# Altium PCB PCB.PcbDoc
Units mil, origin at the board's own origin, x right, y up, seen from the top; angles counter-clockwise.
Board outline 2045 x 1355 mil, 4 copper layers (Top Layer, Layer 1, Layer 2, Bottom Layer), stack 60.91 mil thick; 42 components, 30 nets, 133 pads, 54 vias.
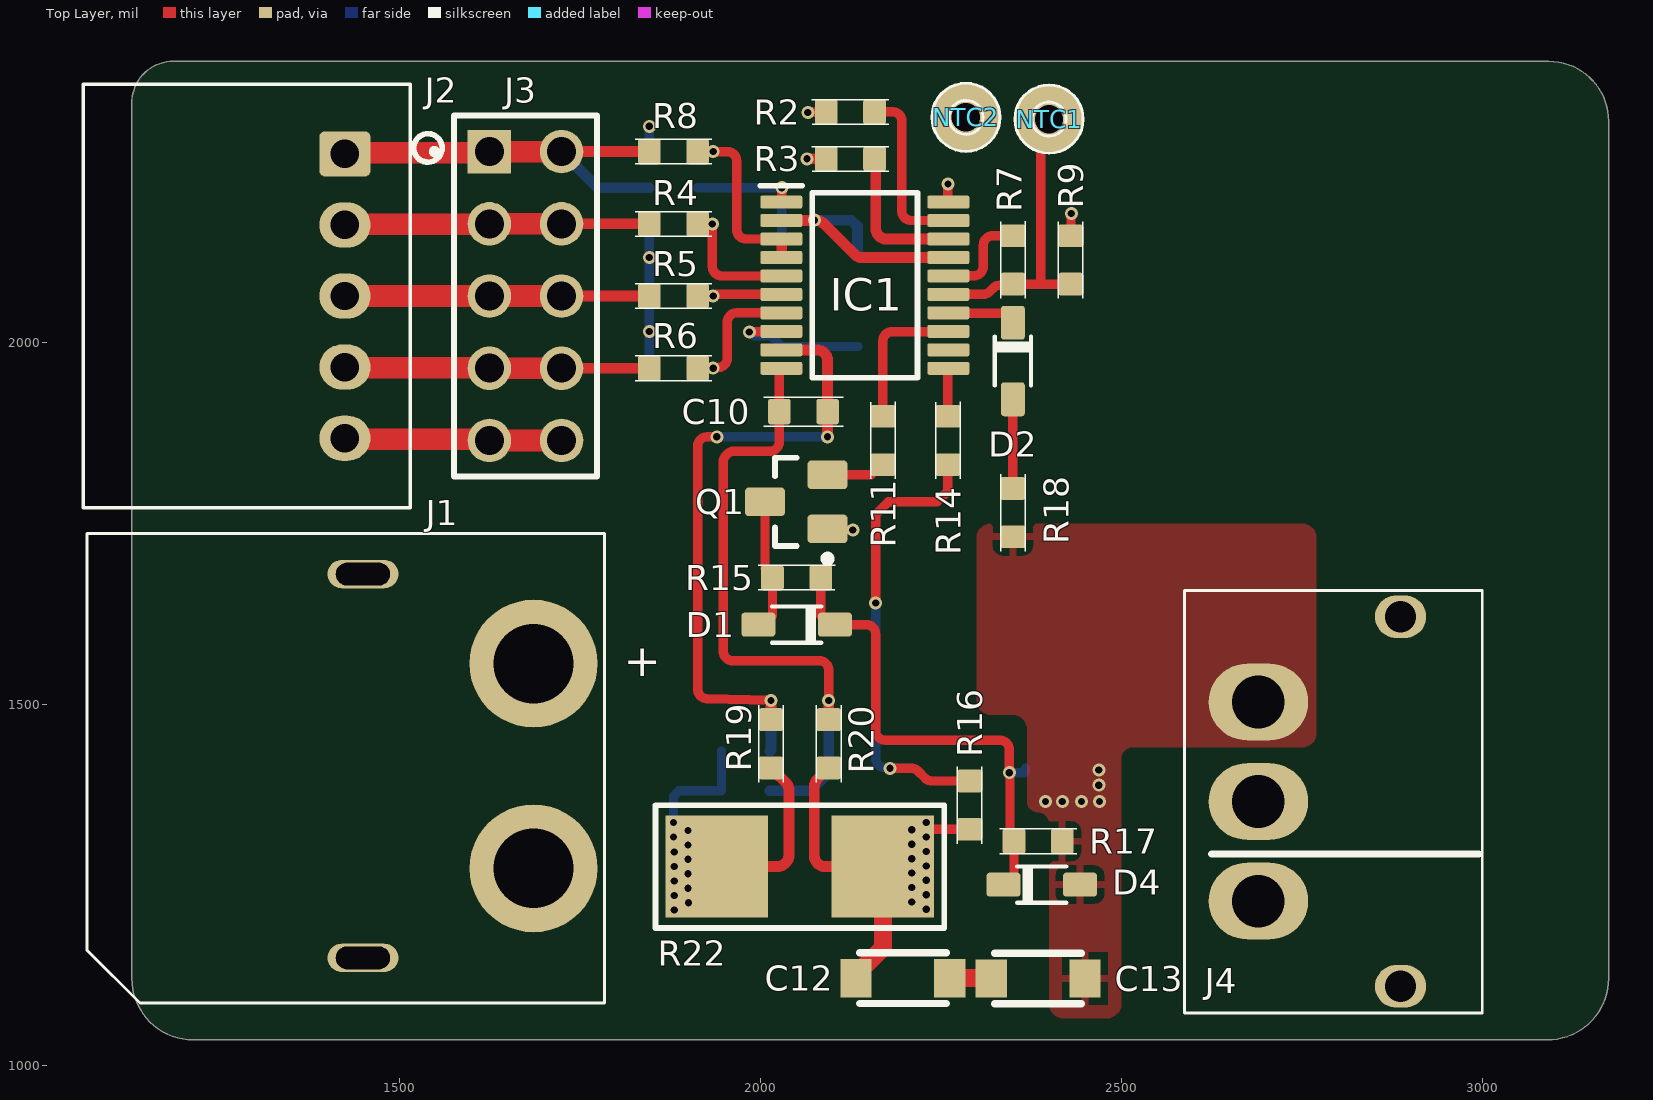
[diagram p0: Top Layer view]
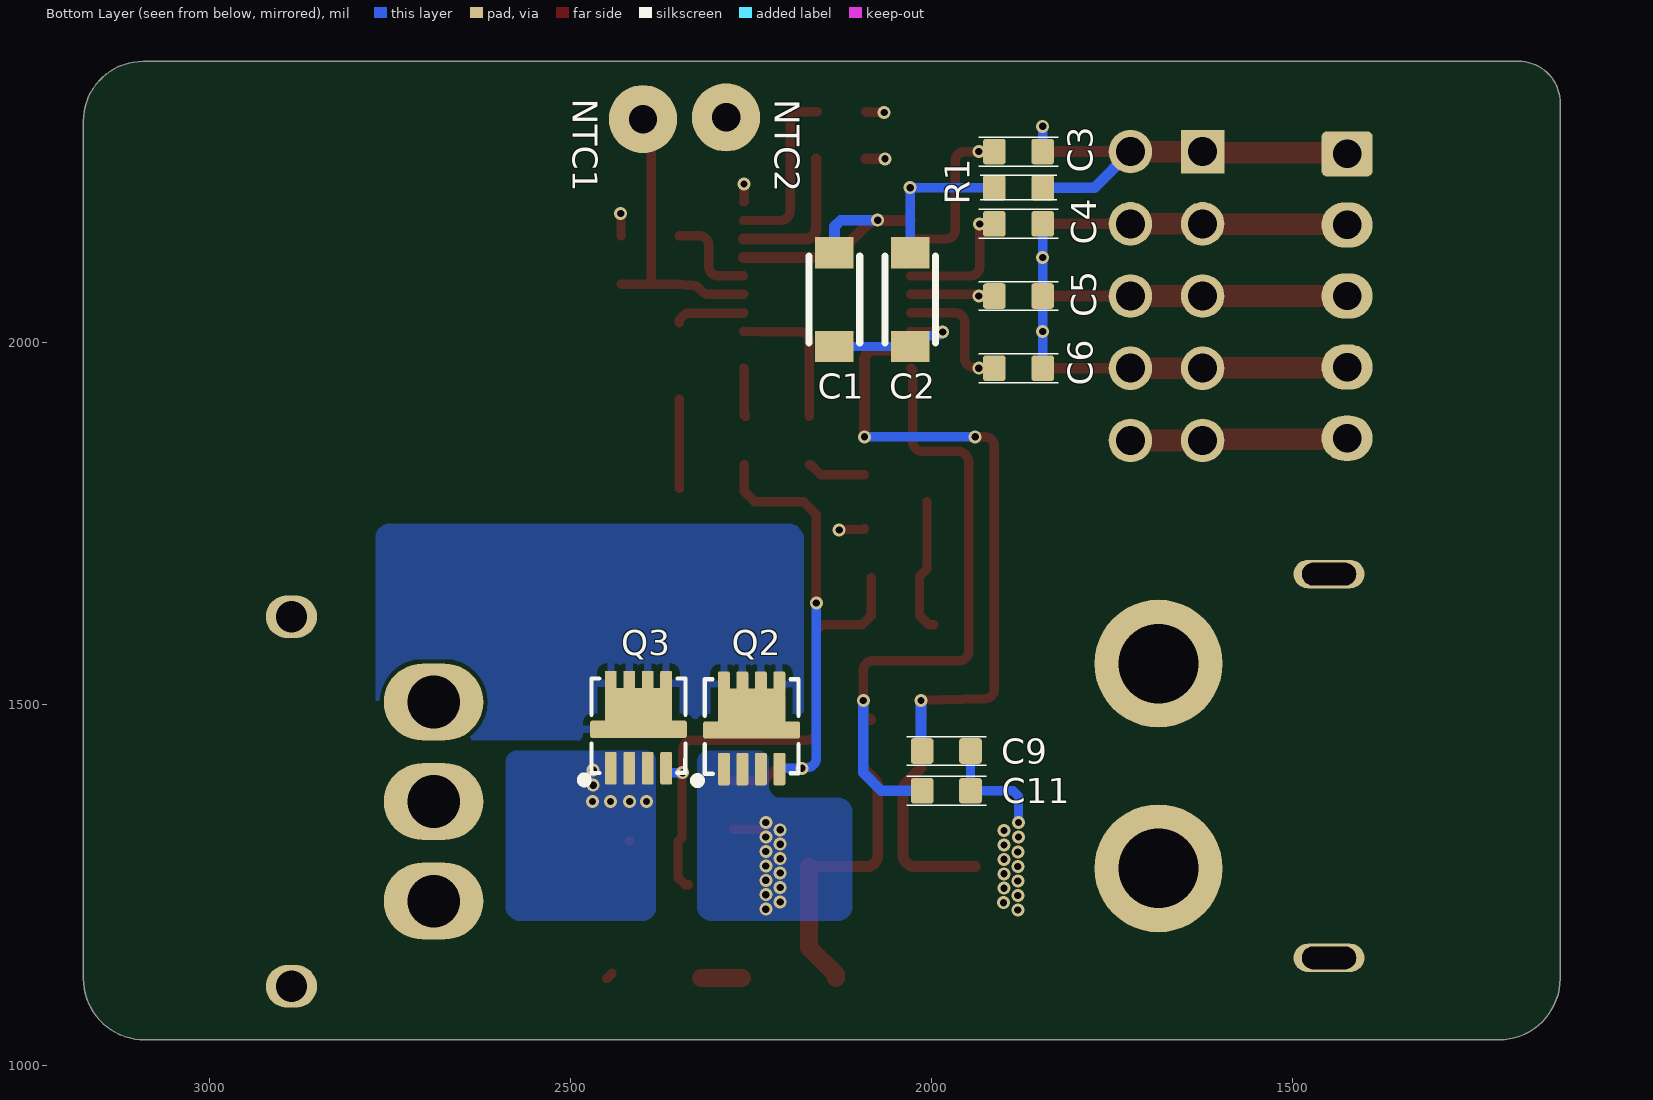
[diagram p1: Bottom Layer view, seen from below]
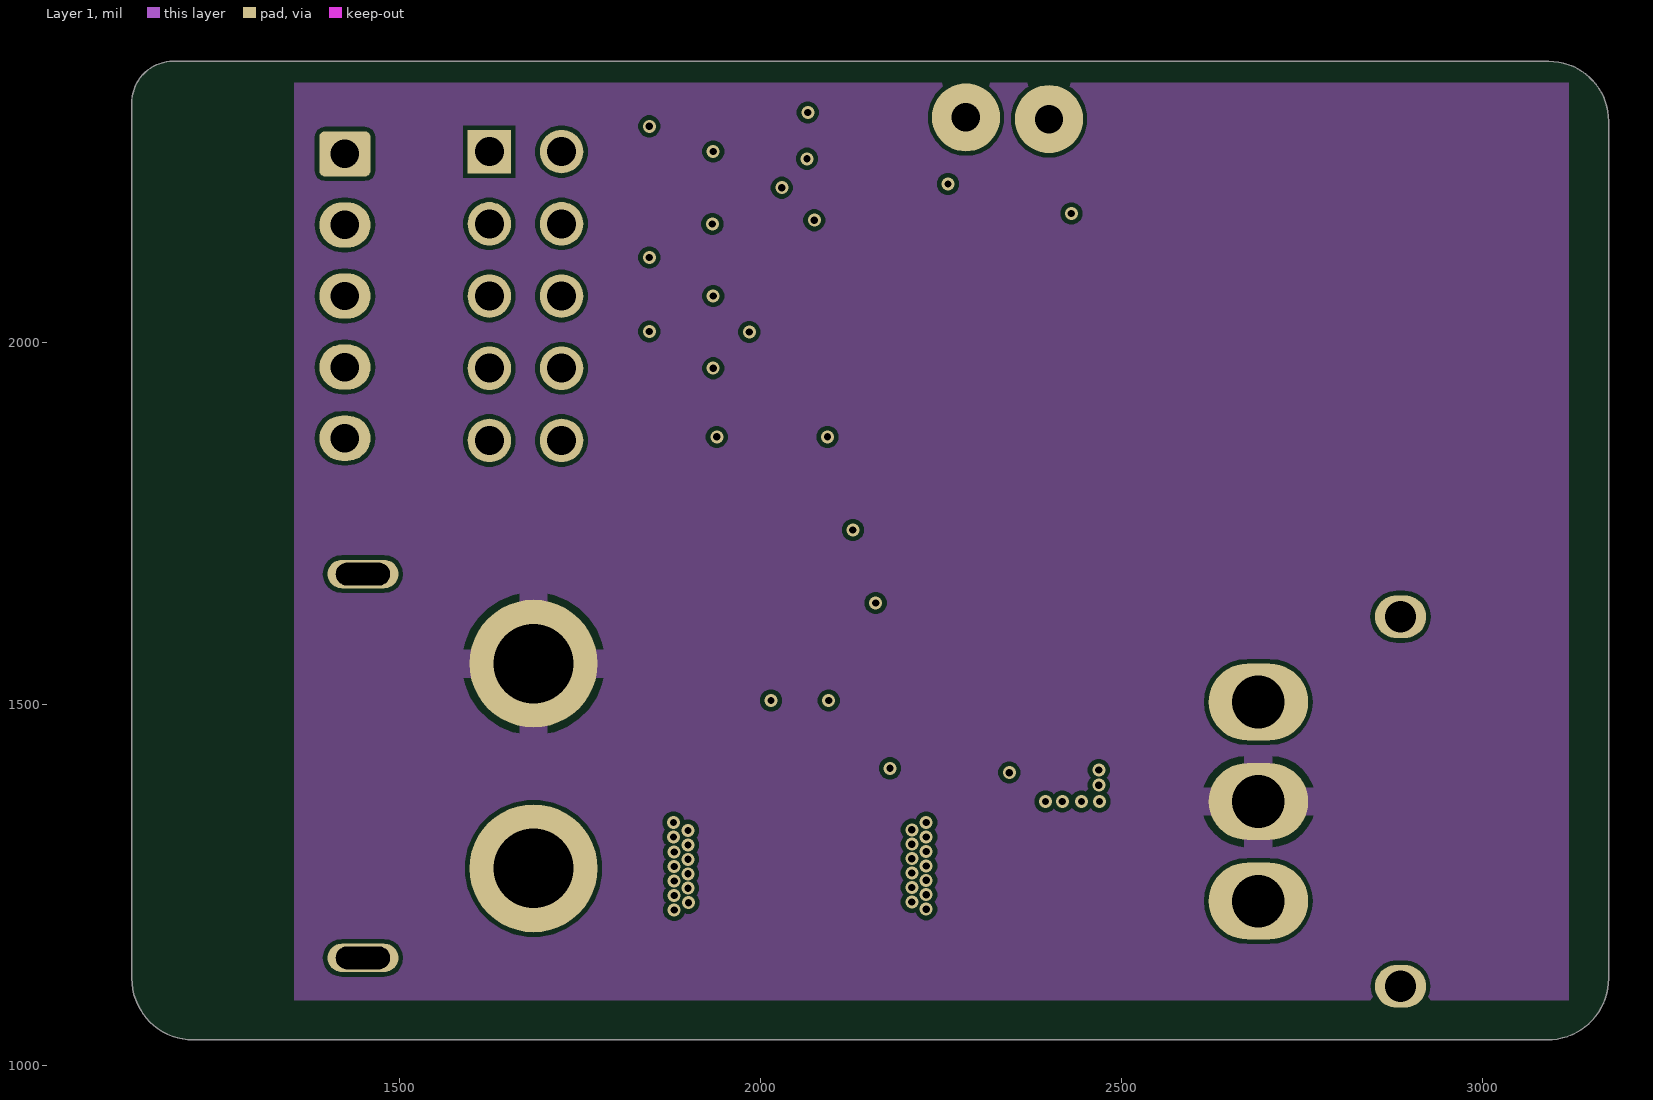
[diagram p2: Layer 1]
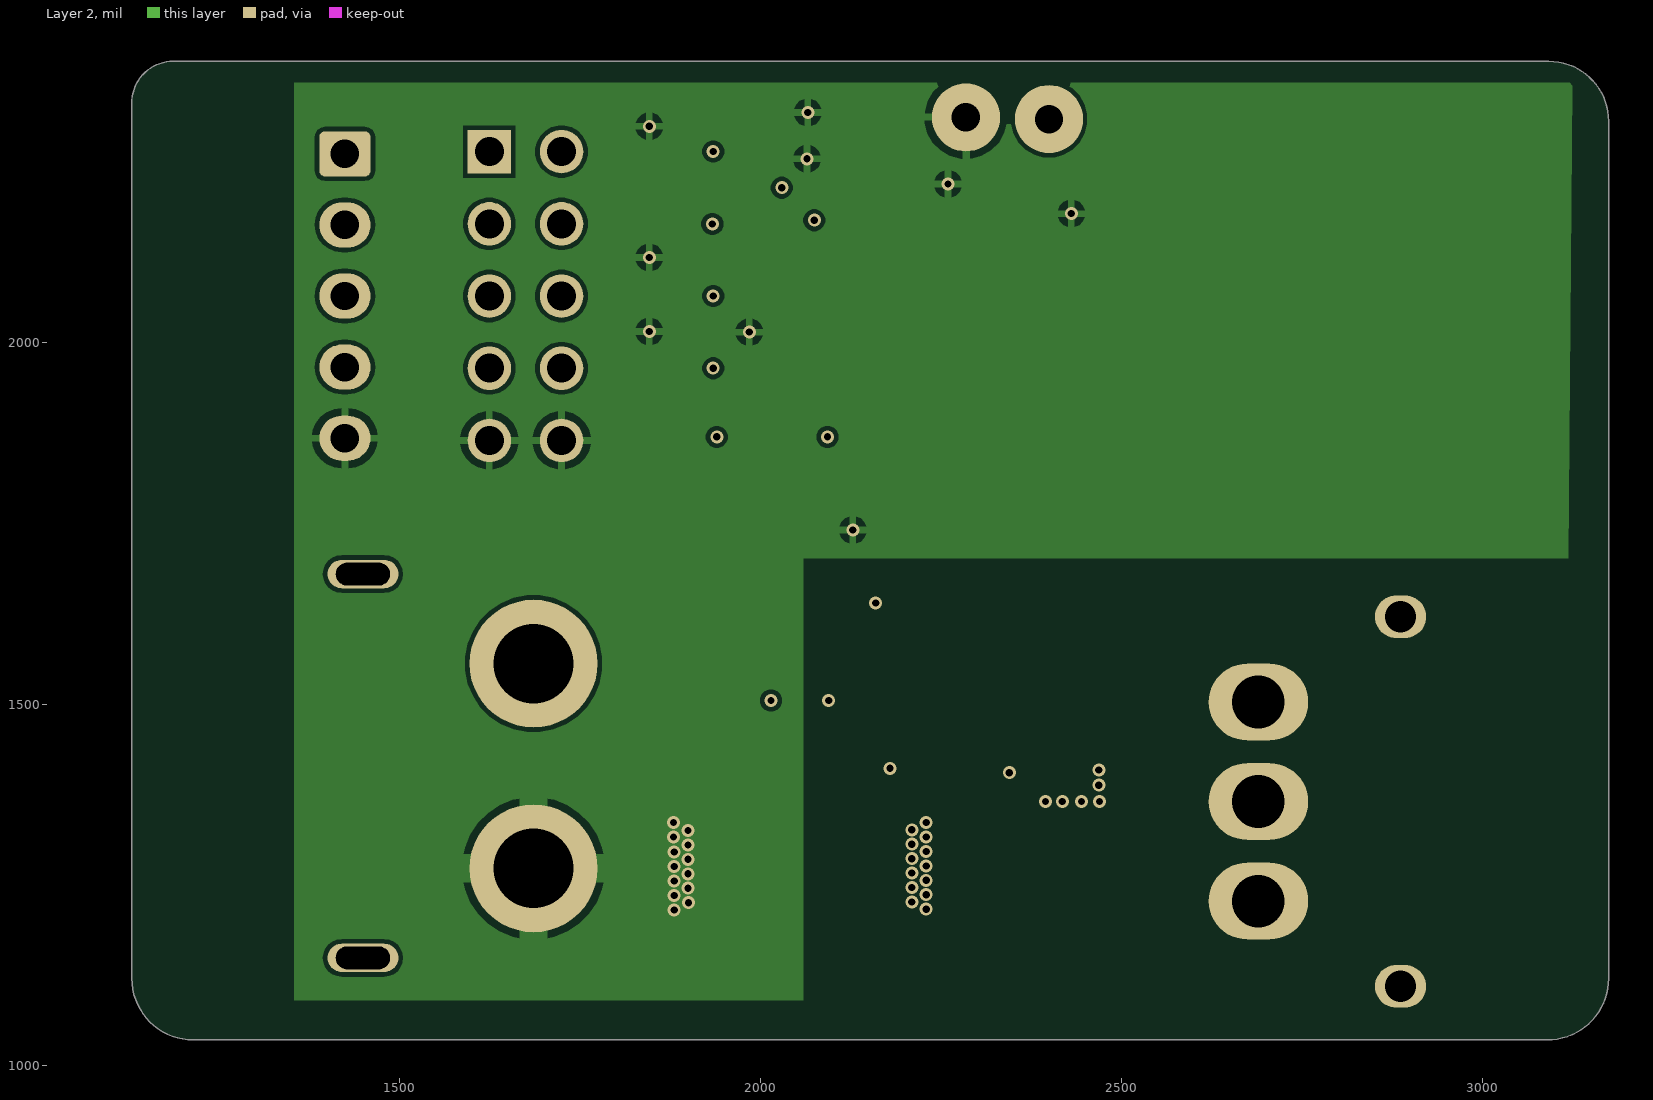
[diagram p3: Layer 2]
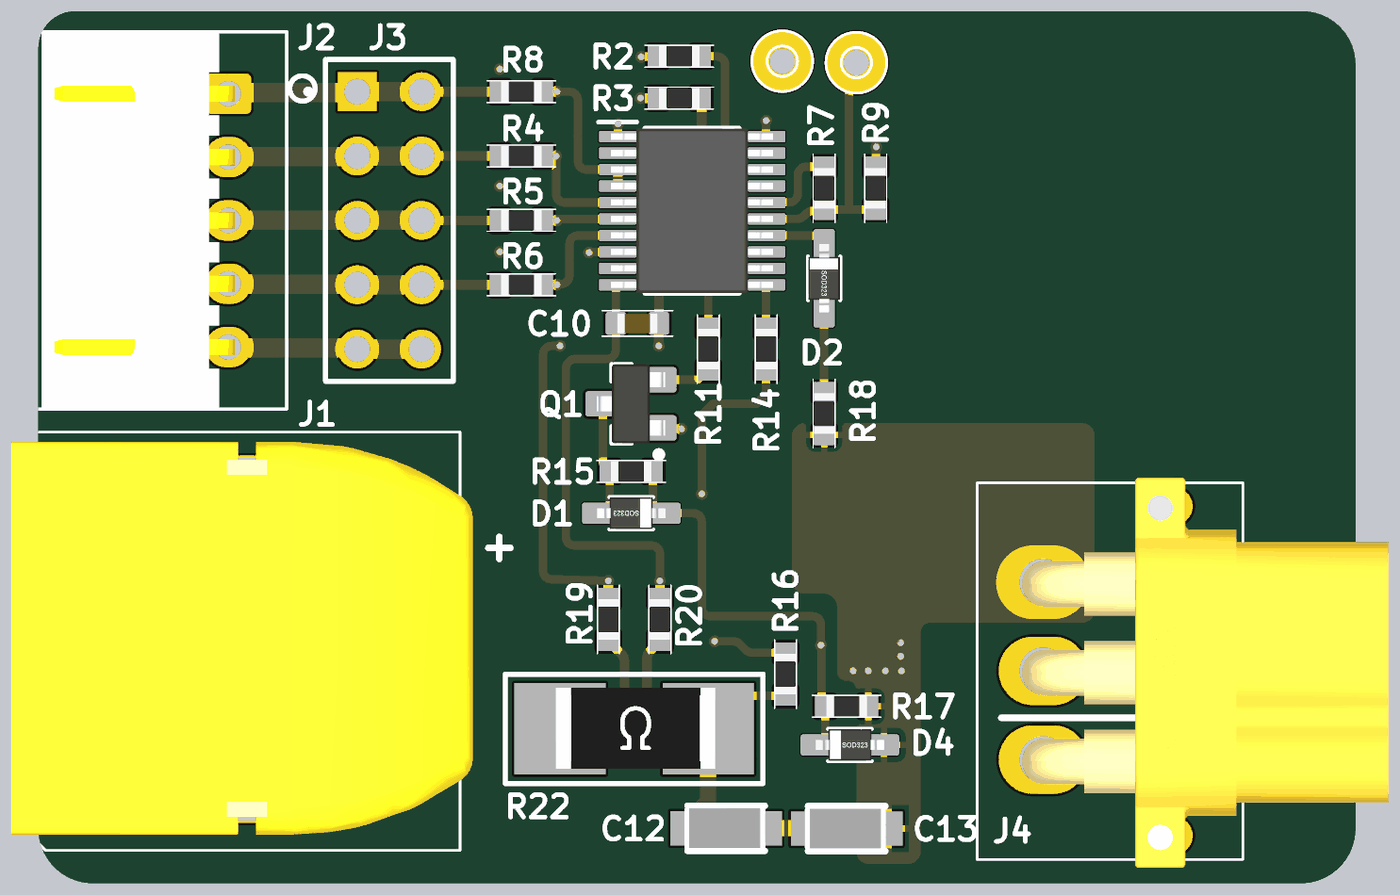
[diagram p4: 3D render of the assembled board from above, using the file's embedded part models]
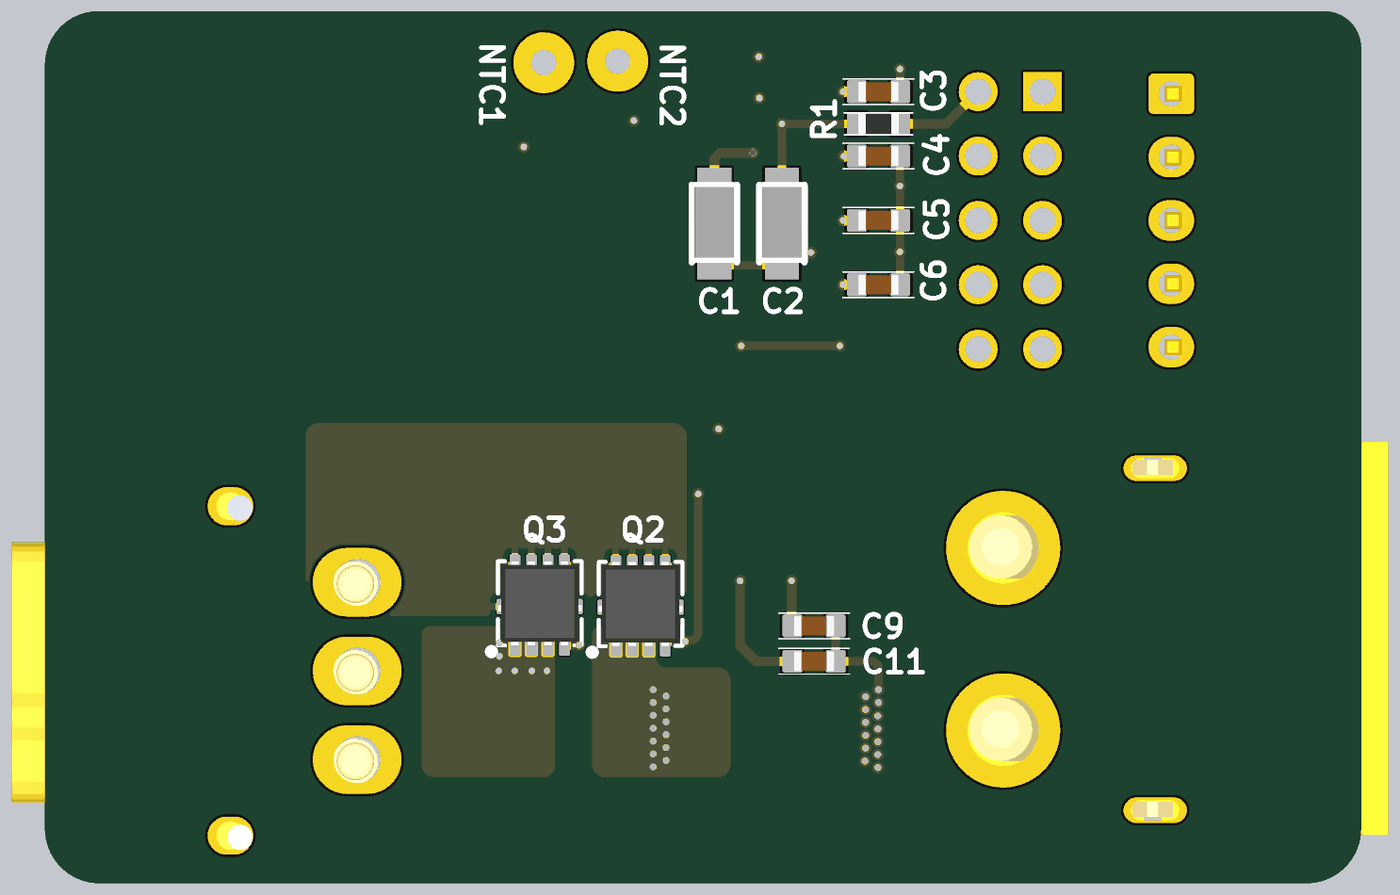
[diagram p5: 3D render of the assembled board from below, using the file's embedded part models]

## Layer stack, top to bottom
Top Solder: solder mask 0.4, Solder Resist, Dk 3.7
Top Layer: signal copper 1.4
Dielectric 2: prepreg 2.7165, PP-006, Dk 4.3
Dielectric 4: prepreg 2.7165, PP-006, Dk 4.3
Layer 1: signal copper 1.378
Dielectric 1: dielectric 44.4882, FR-4, Dk 4.6
Layer 2: signal copper 1.378
Dielectric 5: prepreg 2.7165, PP-006, Dk 4.3
Dielectric 3: prepreg 2.7165, PP-006, Dk 4.3
Bottom Layer: signal copper 1.4
Bottom Solder: solder mask 0.4, Solder Resist, Dk 3.7

## Board outline
1215,1035 3090,1035 ccw(c3090,1120) 3175,1120 3175,2307.07 ccw(c3092.07,2307.07) 3092.07,2390 1187.27,2390 ccw(c1187.27,2332.73) 1130,2332.73 1130,1120 ccw(c1215,1120)

## Design rules (kind name [scope] priority, off if disabled: settings)
Clearance [All] p1: gap=6 ignorepadtopadclearanceinfootprint=FALSE
HoleSize [All] p1: absolutevalues=TRUE maxlimit=100 minlimit=10 maxpercent=80.000 minpercent=20.000
MinimumSolderMaskSliver [All] p1: minsoldermaskwidth=3
PolygonConnect [All] p1: connectstyle=Relief reliefconductorwidth=10 reliefentries=4 polygonreliefangle="90 Angle" airgapwidth=10
RoutingVias [All] p1: holewidth=28 width=50 viastyle="Through Hole" minholewidth=28 minwidth=50 maxholewidth=28 maxwidth=50
SilkToSilkClearance [All] p1: silktosilkclearance=5
SilkToSolderMaskClearance [IsPad] p1: minsilkscreentomaskgap=3 clearancetoexposedcopper=TRUE
SolderMaskExpansion [All] p1: expansion=4 istentingtop=FALSE
Width [All] p1: maxlimit=75 minlimit=5 preferedwidth=12
26 further rules are at their usual default settings.

## Components (designator, comment, footprint, x,y, rotation, side; value= is the part's Value field where it differs from the comment)
C1 "GRM31CC72A475ME11L" C3216_Commercial 2135,2060 r270 bottom value=4.7uF
C2 "GRM31CC72A475ME11L" C3216_Commercial 2030,2060 r270 bottom value=4.7uF
C3 "06035C104K4Z2A" C0603 1880,2265 r0 bottom value=100n
C4 "06035C104K4Z2A" C0603 1880,2165 r0 bottom value=100n
C5 "06035C104K4Z2A" C0603 1880,2065 r0 bottom value=100n
C6 "06035C104K4Z2A" C0603 1880,1965 r0 bottom value=100n
C9 "06035C104K4Z2A" C0603 1980,1435 r0 bottom value=100n
C10 "06035C104K4Z2A" C0603 2060,1905 r180 top value=100n
C11 "06035C104K4Z2A" C0603 1980,1380 r180 bottom value=100n
C12 "GRT31C5C2A104JA12L" C3216_Commercial 2197.78,1120.49 r0 top value=100nF
C13 "GRT31C5C2A104JA12L" C3216_Commercial 2385,1120 r0 top value=100nF
D1 "NRVB0540T1G" SOD323 2050.51,1610 r0 top
D2 "NRVB0540T1G" SOD323 2350,1975 r90 top
D4 "PDZ15B,115" SOD323 2390,1250 r180 top value=15V
IC1 "BQ7790521PW" SOP65P640X120-20N 2145,2080 r0 top
J1 "XT60-PCB-M" XT60-PCB-M 1686.22,1555.98 r0 top
J2 "S5B-XH-A(LF)(SN)" JST_S5B-XH-A(LF)(SN) 1425,2065 r270 top
J3 "HTSW-105-08-TM-D" SAMTEC_HTSW-105-08-TM-D 1675,2065 r270 top
J4 "MR30PW-FB" MR30PW-FB 2690,1227.2 r180 top
NTC1 "TP" "Pad0.8mm MPoint big" 2400,2310 r90 top
NTC2 "TP" "Pad0.8mm MPoint big" 2285,2312.38 r90 top
Q1 "FDV304P" FAIR-SOT23-3_V 2050,1780 r180 top
Q2 "FDMC86102L" PowerPak1212_LFPAK33 2249.66,1469 r180 bottom
Q3 "FDMC86102L" PowerPak1212_LFPAK33 2406.26,1470 r180 bottom
R1 "ERJ-3EKF1002V" R0603 1880,2215 r180 bottom value=1K
R2 "CR0603-FX-10R0ELF" R0603 2125,2320 r0 top value=10R
R3 "CR0603-FX-10R0ELF" R0603 2125,2255 r0 top value=10R
R4 "ERJ-3EKF1002V" R0603 1880,2165 r180 top value=1K
R5 "ERJ-3EKF1002V" R0603 1880,2065 r180 top value=1K
R6 "ERJ-3EKF1002V" R0603 1880,1965 r180 top value=1K
R7 "CRGP0603F10K" R0603 2350,2115 r270 top value=10K
R8 "ERJ-3EKF1002V" R0603 1880,2265 r180 top value=1K
R9 "CRGP0603F10K" R0603 2430,2115 r90 top value=10K
R11 "RC0603FR-074K7L" R0603 2170,1865 r270 top value=4K7
R14 "RC0603FR-074K7L" R0603 2260,1865 r270 top value=4K7
R15 "RC0603JR-071ML" R0603 2050.51,1675 r0 top value=1M
R16 "RC0603JR-071ML" R0603 2290,1360 r270 top value=1M
R17 "RC0603JR-071ML" R0603 2385,1310 r0 top value=1M
R18 "CRGCQ0603F470K" R0603 2350,1765 r270 top value=470K
R19 "RC0603FR-07100RL" R0603 2015,1445 r270 top value=100R
R20 "RC0603FR-07100RL" R0603 2095,1445 r270 top value=100R
R22 "GMR100HTBFMR033" Shunt_2512 2055,1275 r0 top value=0R033

## Footprints (in the part's own frame and the unit in brackets; to place one, negate y for a bottom-side part, rotate by r counter-clockwise, add the part's x,y. Pads: shape width x height; smd on the part's side, far side on the other; paste and mask are expansions set on the pad)
C0603 [mm]
  rrect25% 0.8x0.9 smd: 1(-0.85,0) 2(0.85,0)
  silkscreen extent -1.4,-0.51 1.4,0.51, body extent -0.8,-0.4 0.8,0.4, height 0.6
C3216_Commercial [mm]
  rect 1.1x1.35 smd: 1(-1.65,0) 2(1.65,0)
  silkscreen extent -1.52,-0.89 1.52,0.89, body extent -1.65,-0.8 1.55,0.8, height 1.6
FAIR-SOT23-3_V [mm]
  rrect25% 1.4x1 smd: 1(-1.1,0.95) 2(-1.1,-0.95) 3(1.1,0)
  silkscreen extent -1.23,-1.55 0.75,2.12, body extent -1.35,-1.56 1.35,1.56, height 1.2
JST_S5B-XH-A(LF)(SN) [mm]
  rrect25% 1.59x1.8 hole 1: 1(-5,0)
  oval 1.59x1.8 hole 1: 2(-2.5,0) 3(0,0) 4(2.5,0) 5(5,0)
  silkscreen extent -7.45,-9.2 7.45,3.42, body extent -7.45,-7.37 7.45,0.25, height 5.75
MR30PW-FB [mm]
  oval 3.5x2.7 hole 1.85: 1(0,0) 2(0,-3.5) 3(0,-7)
  oval 1.8x1.5 hole 1.1: 5(-5,3) 5(-5,-10)
  silkscreen extent -7.87,-10.92 2.6,3.94, body extent -13.62,-11.13 0.83,4.27, height 5.3
"Pad0.8mm MPoint big" [mm]
  round 2.4 hole 1: 1(0,0)
  silkscreen extent -1.2,-1.2 1.2,1.2
PowerPak1212_LFPAK33 [mil]
  rrect25% 16.5x45 smd mask+2: 1(-38.4,-59) 2(-12.8,-59) 3(12.8,-59) 4(38.4,-59)
  rrect25% 16.5x34 smd mask+2: 5(-38.4,59) 5(-12.8,59) 5(12.8,59) 5(38.4,59)
  rrect25% 134x24 smd mask+2: 5(0,-5)
  rrect25% 93.31x69.29 smd mask+2: 5(0.01,17.78)
  silkscreen extent -77,-77 65,65, body extent -65,-65 65,65, height 44
R0603 [mm]
  rrect25% 0.8x0.9 smd: 1(-0.85,0) 2(0.85,0)
  silkscreen extent -1.35,-0.43 1.35,0.43, body extent -0.8,-0.4 0.8,0.4, height 0.4
SAMTEC_HTSW-105-08-TM-D [mm]
  rect 1.53x1.53 hole 1.02: 01(-5.08,-1.27)
  round 1.53 hole 1.02: 02(-5.08,1.27) 03(-2.54,-1.27) 04(-2.54,1.27) 05(0,-1.27) 06(0,1.27) 07(2.54,-1.27) 08(2.54,1.27) 09(5.08,-1.27) 10(5.08,1.27)
  silkscreen extent -6.35,-3.3 6.35,2.51
Shunt_2512 [mm]
  rect 3.6x3.6 smd: 1(-2.921,0) 2(2.921,0)
  silkscreen extent -5.08,-2.16 5.08,2.16, body extent -3.09,-1.57 3.21,1.63, height 0.66
SOD323 [mil]
  rrect25% 47x33 smd paste+0 mask+2: 1(-53,0) 2(53,0)
  silkscreen extent -34,-25 34,25, body extent -53,-25 53,25, height 43
SOP65P640X120-20N [mm]
  rrect25% 1.475x0.45 smd mask+0.051: 1(-2.938,2.925) 2(-2.938,2.275) 3(-2.938,1.625) 4(-2.938,0.975) 5(-2.938,0.325) 6(-2.938,-0.325) 7(-2.938,-0.975) 8(-2.938,-1.625) 9(-2.938,-2.275) 10(-2.938,-2.925) 11(2.938,-2.925) 12(2.938,-2.275) 13(2.938,-1.625) 14(2.938,-0.975) 15(2.938,-0.325) 16(2.938,0.325) 17(2.938,0.975) 18(2.938,1.625) 19(2.938,2.275) 20(2.938,2.925)
  silkscreen extent -3.67,-3.25 1.85,3.5, body extent -3.2,-3.25 3.2,3.25, height 1.13
XT60-PCB-M [mm]
  round 4.5 hole 2.8: 1(0,0) 2(0,-7.2)
  oval 2.5x1 hole 0.8 slot 1.9 at 0 deg: 3(-6,-10.35) 4(-6,3.15)
  silkscreen extent -15.7,-11.94 2.5,4.57, body extent -15.2,-11.31 3,4.19, height 8.41

## Part data
C1 C2: library part CC_1206_X7S_475, "Capacitor X7S", Supplier Part Number 1=81-GRM31CC72A475ME11, Supplier 1=Mouser, Supplier 2=Digi-Key, Supplier Part Number 2=490-18621-6-ND
C3 C4 C5 C6 C9 C10 C11: library part CC_0603_X7R_104, "Ceramic Capacitor X7R 50V", Manufacturer Part Number="100n/50V X7R C0603", Supplier Part Number 1=581-06035C104K4Z2A, Category="Capacitors CERA SMD", Component Type=Capacitors, Main=Capacitors, Part Number="100n/50V X7R C0603", SMD/THD=SMD, Status=A, Supplier 1=Mouser, Supplier 2=Farnell, Supplier Part Number 2=1833843
C12 C13: library part CC_1206_NP0_104, "Capacitor NP0", Supplier Part Number 1=81-GRT31C5C2A104JA2L, Supplier 1=Mouser, Supplier 2=Digi-Key, Supplier Part Number 2=490-GRT31C5C2A104JA12LDKR-ND
D1 D2: "Schottky Diode 40V, 500mA", Supplier Part Number 1=863-NRVB0540T1G, Category=Schottky, Main=Diodes, SMD/THD=SMD, Status=A, Supplier 1=Mouser, Supplier 2=Farnell, Supplier Part Number 2=2723913
D4: "Zener Diode 15V, 400mW", Supplier Part Number 1=771-PDZ15B-T/R, Category=Zener, Main=Diodes, SMD/THD=SMD, Status=A, Supplier 1=Mouser, Supplier 2=Farnell, Supplier 3=TME, Supplier Part Number 2=1757852, Supplier Part Number 3=PDZ15B.115
IC1: "3- to 5-series Li-Ion stackable battery protector", Manufacturer_Name="Texas Instruments", Mouser Part Number=595-BQ7790521PW, Supplier Part Number 1=595-BQ7790521PWR, Datasheet Link=https://www.ti.com/lit/ds/symlink/bq77905.pdf?ts=1621687207060&ref_url=https%253A%252F%252Fwww.ti.com%252Fstore%252Fti%252Fen%252Fp%252Fproduct%252F%253Fp%253DBQ7790521PW, Height=1.2mm, Manufacturer_Part_Number=BQ7790521PW, Mouser Price/Stock=https://www.mouser.co.uk/ProductDetail/Texas-Instruments/BQ7790521PW?qs=bAKSY%2FctAC4iC2ww%2F8Jy9A%3D%3D, Supplier 1=Mouser, Supplier 2=Digi-Key, Supplier 3="Texas Instruments", Supplier Part Number 2=296-BQ7790521PWRCT-ND, Supplier Part Number 3=BQ7790521PWR
J1: "XT60 Connector", Manufacturer_Name=Amass, Manufacturer_Part_Number=XT30PB, Datasheet Link=https://www.tme.eu/Document/4acc913878197f8c2e30d4b8cdc47230/XT30UPB%20SPEC.pdf, Height=10.7mm
J2: "Connector Header Through Hole, Right Angle 5 position 0.098 _2.50mm_", Package=None, Availability=Unavailable, MF="JST Sales", MP=S5B-XH-A_LF__SN_, Price=None, SnapEDA_Link=https://www.snapeda.com/parts/S5B-XH-A%28LF%29%28SN%29/JST%20Sales%20America%20Inc./view-part/494428/?ref=snap
J3: "HEADER, 10 CONTACTS, 2 ROWS, THROUGH HOLE, 2.54 MM; Connector Systems:Board-to-Board; Pitch Spacing:2.54mm; No. of Rows:2Rows; No. of Contacts:10Contacts; Contact Termination Type:Through Hole; Product Range:HTSW Series RoHS Compliant: Yes", Package=None, Availability="In Stock", Check_prices=https://www.snapeda.com/parts/HTSW10508TMD/Samtec/view-part/?ref=eda, MF=Samtec, MP=HTSW10508TMD, Price=None, SnapEDA_Link=https://www.snapeda.com/parts/HTSW10508TMD/Samtec/view-part/?ref=snap
J4: "Connector", Supplier 1=TME, Supplier Part Number 1=MR30PW-FB
NTC1 NTC2: library part TP_PCB, "Test Point", Category=Pads_Pins_Measure_Points, Component Type=Mechanical, Main=Mechanical, Stock number=--------
Q1: "P-Channel Digital FET, -25 V, -0.46 A, 0.35 W, -55 to 150 degC, 3-Pin SOT-23, -55 to 150 degC, RoHS, Tape and Reel", Manufacturer="ON Semiconductor / Fairchild", Maximum Continuous Drain Current=0.46A, Maximum Drain Source Voltage=25V, Maximum Gate Source Voltage=8V, Operating Temperature=-55to150°C, Package=3SOT-23, Package Description="3-Pin Small Outline Transistor, Body 2.92 x 1.325 mm, Pitch 0.95 mm", Package Reference=SOT23-3, Package Version="Rev. 12, 03/2016", Supplier Part Number 1=FDV304PCT-ND, Category=MOSFET, Channel Mode=Enhancement, Channel Type=P, Datasheet URL=https://www.fairchildsemi.com/datasheets/FD/FDV304P.pdf, Datasheet Version="Rev. E1, 08/1997", Manufacturer Part Number=FDV304P, Manufacturer URL=https://www.fairchildsemi.com/, Mounting=SurfaceMount, Mounting Technology=SurfaceMount, Package URL=http://www.fairchildsemi.com/dwg/MA/MA03D.pdf, Packaging=Tape&Reel, Rad Hard=No, RDS-on=1100@4.5VmOhm, Supplier 1=Digi-Key, Supplier 2=Digi-Key, Supplier Part Number 2=FDV304PDKR-ND, Typical Fall Time=35ns, Typical Rise Time=8ns, Typical Turn-Off Delay Time=55ns, Typical Turn-On Delay Time=6ns
Q2 Q3: "N-MOS 100V, 18A, 23mOhm", Manufacturer="ON Semiconductor / Fairchild", Category=N-MOS, Component Type=Transistors, ComponentLink1Description=Datasheet, ComponentLink1URL=http://www.farnell.com/datasheets/1837750.pdf, Main=Transistors, Manufacturer Part Number=FDMC86102L, Part Number=FDMC86102L, SMD/THD=SMD, Status=A
R1 R4 R5 R6 R8: library part CR_0603_102, "Resistor 1%, 0.1W, 75V", Supplier Part Number 1=667-ERJ-3EKF1002V, Category="Resistors SMD", Component Type=Resistors, Main=Resistors, SMD/THD=SMD, Status=A, Supplier 1=Mouser, Supplier 2=Digi-Key, Supplier 3=Farnell, Supplier Part Number 2=P10.0KHCT-ND, Supplier Part Number 3=2303192
R2 R3: library part CR_0603_100, "Resistor 1%, 0.1W, 75V", Supplier Part Number 1=652-CR0603FX-10R0ELF, Category="Resistors SMD", Component Type=Resistors, Main=Resistors, SMD/THD=SMD, Status=A, Supplier 1=Mouser, Supplier 2=Farnell, Supplier 3=Digi-Key, Supplier Part Number 2=2321756, Supplier Part Number 3=CR0603-FX-10R0ELFDKR-ND
R7 R9: library part CR_0603_103, "Resistor 1%, 0.1W, 75V", Supplier Part Number 1=279-CRGP0603F10K, Category="Resistors SMD", Component Type=Resistors, Main=Resistors, SMD/THD=SMD, Status=A, Supplier 1=Mouser, Supplier 2=Digi-Key, Supplier 3=Farnell, Supplier Part Number 2=A130428CT-ND, Supplier Part Number 3=2861046
R11 R14: library part CR_0603_472, "Resistor 1%, 0.1W, 75V", Supplier Part Number 1=603-RC0603FR-074K7L, Category="Resistors SMD", Component Type=Resistors, Main=Resistors, SMD/THD=SMD, Status=A, Supplier 1=Mouser, Supplier 2=Farnell, Supplier 3=TME, Supplier Part Number 2=9238565, Supplier Part Number 3=RC0603FR-074K7
R15 R16 R17: library part CR_0603_105, "Resistor 1%, 0.1W, 75V", Manufacturer Part Number="1M0 R0603", Supplier Part Number 1=603-RC0603JR-071ML, Category="Resistors SMD", Component Type=Resistors, Main=Resistors, Part Number="1M0 R0603", SMD/THD=SMD, Status=A, Supplier 1=Mouser, Supplier 2=TME, Supplier 3=Digi-Key, Supplier Part Number 2=RC0603JR-071M, Supplier Part Number 3=311-1.0MGRCT-ND
R18: library part CR_0603_474, "Resistor 1%, 0.1W, 75V", Supplier Part Number 1=279-CRGCQ0603F470K, Category="Resistors SMD", Component Type=Resistors, Main=Resistors, SMD/THD=SMD, Status=A, Supplier 1=Mouser, Supplier 2=Digi-Key, Supplier 3=TME, Supplier Part Number 2=A129720CT-ND, Supplier Part Number 3=CRGCQ0603F470K
R19 R20: library part CR_0603_101, "Resistor 1%, 0.1W, 75V", Supplier Part Number 1=603-RC0603FR-07100RL, Category="Resistors SMD", Component Type=Resistors, Main=Resistors, SMD/THD=SMD, Status=A, Supplier 1=Mouser, Supplier 2=Farnell, Supplier 3=TME, Supplier Part Number 2=9238360, Supplier Part Number 3=RC0603FR-07100R
R22: library part SHUNT_2512_0R033, "Current Sense Resistor 1%, 3W, AEC-Q200", Supplier Part Number 1=755-GMR100HTBFMR033, Category="Resistors SMD", Component Type=Resistors, Main=Resistors, SMD/THD=SMD, Status=A, Supplier 1=Mouser, Supplier 2=Digi-Key, Supplier 3=Farnell, Supplier Part Number 2=511-1690-1-ND, Supplier Part Number 3=2808333

## Via types
v1: diameter 18, hole 10, Top Layer to Bottom Layer, tented both sides, 54 vias

## Nets (pads, with @x,y where several pads share a name; then routed paths per layer and width w, separated by ;. In a path a pad name is that pad's centre, name@x,y a point inside that pad or via, vN(x,y) a via of type N, cw(c..) or ccw(c..) an arc to the next point about the centre after c; other vN are vias at no path point)
GND: C1.2 C2.2 C3.1 C4.1 C5.1 C6.1 C9.1 C11.2 IC1.8 IC1.20 J1.2 J2.5 J3.09 J3.10 NTC2.1 Q1.1 R2.1 R3.1 R9.2 R19.2 R22.1 | length 1284
  Top Layer w13: v1(1985,2015) 1985.79,2015.79 2029.1,2015.79 IC1.8 ; v1(2065.96,2319.12) 2066.4,2319.56 2091.1,2319.56 R2.1 ; Q1.1 2094.13,1741.78 2127.58,1741.78 v1(2128.4,1740.96) ; v1(2260,2220) 2260,2195.83 IC1.20 ; R9.2 2430.48,2148.94 2430.48,2178.64 v1(2430.96,2179.12)
  Top Layer w15: R22.1 2023.79,1275 ccw(c2023.79,1290) 2034.39,1279.39 2035.61,1280.61 ccw(c2025,1291.21) 2040,1291.21 2040,1380.32 ccw(c2025,1380.32) 2035.61,1390.93 2020.61,1405.93 R19.2 ; v1(2065,2255) R3.1
  Top Layer w30: J2.5 1426.57,1866.57 1623.43,1866.57 J3.09 J3.10
  Bottom Layer w13: C6.1 v1(1846.54,2016.02) C5.1 v1(1846.54,2118.39) C4.1 ; C3.1 v1(1846.54,2300) ; v1(1880,1335.93) 1880,1372.38 1887.62,1380 C11.2 C9.1 ; v1(1985,2015) 1986.35,2015 1991.16,2010.19 2014.85,2010.19 C2.2 C1.2
  other v1: 1880.94,1214.96 1900.94,1224.96 1880.94,1234.96 1900,1245 1880.94,1254.96 1900,1265 1880.94,1274.96 1900,1285 1880.94,1294.96 1900,1305 1880,1315.93 1900,1325
NetC1_1: C1.1 IC1.2 IC1.17 | length 351.5
  Top Layer w15: IC1.2 2074.57,2169.57 v1(2075,2170) 2077.17,2170 cw(c2077.17,2155) 2087.74,2165.65 2130.61,2122.77 ccw(c2141.21,2133.39) 2141.21,2118.39 IC1.17
  Bottom Layer w15: v1(2075,2170) 2126.21,2170 2135,2161.21 C1.1
NetC2_1: C2.1 IC1.1 R1.1 | length 226.7
  Top Layer w13: IC1.1 2030,2195.83 v1(2030,2215)
  Bottom Layer w13: R1.1 v1(2030,2215) C2.1
NetC3_2: C3.2 IC1.3 IC1.4 R8.1 | length 264.2
  Top Layer w13: v1(1935,2265) 1954.53,2265 cw(c1954.53,2252) 1967.53,2252.05 1967.53,2156.93 ccw(c1980.53,2156.98) 1980.48,2143.98 IC1.3
  Top Layer w15: R8.1 v1(1935,2265) ; IC1.4 2030,2119.06 2030,2135
  Bottom Layer w15: C3.2 v1(1935,2265)
NetC4_2: C4.2 IC1.5 R4.1 | length 202.7
  Top Layer w13: v1(1933.8,2164.82) 1933.8,2105.8 ccw(c1946.8,2105.8) 1946.8,2092.8 IC1.5
  Top Layer w15: R4.1 1931.47,2165 cw(c1931.47,2150) v1(1933.8,2164.82)
  Bottom Layer w15: C4.2 1913.56,2164.91 1933.71,2164.91 v1(1933.8,2164.82)
NetC5_2: C5.2 IC1.6 R5.1 | length 138.3
  Top Layer w13: v1(1935,2065) 1936.35,2065 1938.56,2067.2 IC1.6
  Top Layer w15: R5.1 v1(1935,2065)
  Bottom Layer w15: C5.2 v1(1935,2065)
NetC6_2: C6.2 IC1.7 R6.1 | length 202.3
  Top Layer w13: v1(1935,1965) 1935.96,1965.96 1941.53,1965.96 ccw(c1941.53,1978.96) 1954.53,1978.96 1954.53,2028.61 cw(c1967.53,2028.61) 1967.53,2041.61 IC1.7
  Top Layer w15: R6.1 v1(1935,1965)
  Bottom Layer w13: C6.2 v1(1935,1965)
NetC9_2: C9.2 C10.1 IC1.9 R19.1 | length 908.1
  Top Layer w13: v1(1940,1870) 1926.52,1870 ccw(c1926.52,1857) 1913.52,1857 1913.52,1520.42 ccw(c1926.52,1520.42) 1926.13,1507.43 v1(2015,1505)
  Top Layer w15: R19.1 v1(2015,1505) ; IC1.9 2078.46,1990.43 cw(c2078.46,1975.43) 2093.46,1975.43 C10.1 2093.39,1904.92 2093.39,1870.08 v1(2093.31,1870)
  Bottom Layer w13: v1(1940,1870) v1(2093.31,1870)
  Bottom Layer w15: C9.2 2015,1436.54 v1(2015,1505)
NetC10_2: C10.2 C11.1 IC1.10 R20.1 | length 881
  Top Layer w13: IC1.10 2028.89,1964.84 2026.54,1962.48 2026.54,1863 cw(c2013.54,1863) 2013.54,1850 1963.73,1850 ccw(c1963.73,1837) 1954.53,1846.19 1952.81,1844.47 ccw(c1962,1835.27) 1949,1835.27 1949,1573 ccw(c1962,1573) 1962,1560 2082,1560 cw(c2082,1547) 2095,1547 v1(2095,1505)
  Top Layer w15: R20.1@2085,1478.46 R20.1@2085.77,1479.23 ; R20.1 v1(2095,1505)
  Bottom Layer w15: C11.1 2070,1380 2095,1405 v1(2095,1505)
NetC12_1: C12.1 Q2.1 Q2.2 Q2.3 R16.2 R20.2 R22.2 | length 454.5
  Top Layer w13: v1(2230,1335.93) 2230,1330.9 2234.37,1326.54 R16.2@2275,1326.54
  Top Layer w15: R20.2 2079.39,1395.93 ccw(c2090,1385.32) 2075,1385.32 2075,1289.95 ccw(c2090,1290) 2089.95,1275 R22.2
  Top Layer w25: C12.1 2132.82,1125.41 2170,1162.59 R22.2
  other v1: 2230,1215.93 2210,1225.93 2230,1235.93 2210,1245.93 2230,1255.93 2210,1265.93 2230,1275.93 2210,1285.93 2230,1295.93 2210,1305.93 2230,1315.93 2210,1325.93
NetC12_2: C12.2 C13.1 | length 57.5
  Top Layer w13: C13.1@2319.55,1120.49 C13.1
  Top Layer w25: C12.2 C13.1@2319.55,1120.49
NetC13_2: C13.2 D4.1 J4.3 Q3.1 Q3.2 Q3.3 R17.2 R18.2 | length 10.3
  Top Layer w13: R17.2 R17.2@2418.8,1310.34 ; C13.2@2443,1126.96 C13.2
  other v1: 2395,1365 2418.46,1365 2445,1365 2470,1365 2468.89,1387.71 2468.89,1408.71
NetD1_1: D1.1 Q1.3 R15.1 | length 186.5
  Top Layer w13: D1.1 2004.51,1610 2017.05,1622.54 R15.1 2017.05,1676.97 2006.69,1687.32 Q1.3
NetD1_2: D1.2 D4.2 Q3.4 R15.2 R17.1 | length 701.2
  Top Layer w13: R15.2 2083.98,1622.54 2096.51,1610 2147,1610 cw(c2147,1597) 2160,1597 2160,1463 ccw(c2173,1463) 2173,1450 2332,1450 cw(c2332,1437) 2345,1437 v1(2345,1405) 2345.96,1404.04 2345.96,1315.58 R17.1 2351.54,1260 2341.54,1250 D4.2
  Bottom Layer w13: v1(2345,1405) 2366.11,1405 2367.86,1406.75 Q3.4
NetD2_1: D2.1 R18.1 | length 123.5
  Top Layer w13: R18.1 D2.1
NetD2_2: D2.2 IC1.14 | length 97
  Top Layer w13: IC1.14 2260.9,2041.38 2340,2041.38 2350,2031.38 D2.2
NetIC1_11: IC1.11 R14.1 | length 67.7
  Top Layer w13: R14.1@2258.03,1898.46 2260,1900.43 2260,1964.17 IC1.11 IC1.11@2260.83,1965
NetIC1_13: IC1.13 R11.1 | length 202.4
  Top Layer w13: R11.1 2170,2002.79 cw(c2183,2002.79) 2183,2015.79 2238.13,2015.79 IC1.13
NetIC1_15: IC1.15 NTC1.1 R7.2 R9.1 | length 406.7
  Top Layer w13: IC1.15 2283.2,2067.44 2308.74,2067.44 ccw(c2308.74,2080.44) 2317.91,2071.22 2322.65,2075.96 cw(c2331.82,2066.74) 2331.82,2079.74 2338.78,2079.74 R7.2 2388.46,2081.54 ; NTC1.1 2388.46,2298.46 2388.46,2081.54 ; R9.1 2388.46,2081.54
NetIC1_16: IC1.16 R7.1 | length 133.4
  Top Layer w13: IC1.16@2260.9,2093.03 2296.08,2093.03 ccw(c2296.08,2106.03) 2309.08,2106.03 2309.08,2135.46 cw(c2322.08,2135.46) 2322.08,2148.46 R7.1
NetIC1_18: IC1.18 R3.2 | length 205.3
  Top Layer w15: R3.2@2160,2255.01 2160,2158.98 ccw(c2175,2158.98) 2175,2143.98 IC1.18
NetIC1_19: IC1.19 R2.2 | length 241.5
  Top Layer w13: R2.2 2183.3,2320 cw(c2183.3,2307) 2196.3,2307.05 2196.3,2182.57 ccw(c2209.3,2182.57) 2209.3,2169.57 IC1.19
NetJ1_1: J1.1 J4.2
NetJ2_1: J2.1 J3.01 J3.02 R1.2 R8.2 | length 565.1
  Top Layer w15: J3.02 R8.2
  Top Layer w30: J2.1 1426.57,2263.43 1623.43,2263.43 J3.01 J3.02
  Bottom Layer w15: J3.02 1775,2215 R1.2
NetJ2_2: J2.2 J3.03 J3.04 R4.2 | length 422.2
  Top Layer w15: J3.04 R4.2
  Top Layer w30: J2.2 1425.79,2164.21 1624.21,2164.21 J3.03 J3.04
NetJ2_3: J2.3 J3.05 J3.06 R5.2 | length 421.5
  Top Layer w15: J3.06 R5.2
  Top Layer w30: J2.3 J3.05 J3.06
NetJ2_4: J2.4 J3.07 J3.08 R6.2 | length 422.2
  Top Layer w15: J3.08 R6.2
  Top Layer w30: J2.4 1425.79,1965.79 1624.21,1965.79 J3.07 J3.08
NetQ1_2: Q1.2 R11.2 | length 82.5
  Top Layer w13: Q1.2 2153.9,1817.4 2168.03,1831.54 R11.2
NetQ2_4: Q2.4 R14.2 R16.1 | length 662.4
  Top Layer w13: v1(2160,1640) 2160,1762.38 2177.62,1780 2245,1780 2260,1795 R14.2 ; v1(2180,1411) 2209.54,1411 cw(c2209.54,1398) 2218.69,1407.24 2228.68,1397.25 ccw(c2237.85,1406.46) 2237.85,1393.46 R16.1
  Bottom Layer w13: v1(2160,1640) 2160,1425.1 ccw(c2173,1425.1) 2171.19,1412.22 v1(2180,1411) v1@2184.97,1410.84 ; v1@2184.98,1410.84 ccw(c2185.44,1423.83) 2185.44,1410.83 2209.51,1410.83 Q2.4
NetQ2_5: Q2.5 Q3.5
pads on no net: IC1.12 J1.3 J1.4 J4.1 J4.5

## Polygon pours and split planes (outlines as drawn)
NetC12_1 on Bottom Layer "NETC12_1_L04_P001" (solid, pour order 1): 2325,1220 2325,1420 ccw(c2310,1420) 2310,1435 2240,1435 ccw(c2240,1420) 2225,1420 2225,1385 cw(c2210,1385) 2210,1370 2130,1370 ccw(c2130,1350) 2110,1350 2110,1220 ccw(c2130,1220) 2130,1200 2305,1200 ccw(c2305,1220)
NetQ2_5 on Bottom Layer "NETQ2_5_L04_P000" (solid, pour order 0): 2197.5,1450 2750,1450 ccw(c2750,1470) 2770,1470 2770,1730 ccw(c2750,1730) 2750,1750 2200,1750 ccw(c2200,1727.5) 2177.5,1727.5 2177.5,1470 ccw(c2197.5,1470)
NetC13_2 on Bottom Layer "NETC13_2_L04_P002" (solid, pour order 2): 2395,1435 2575,1435 cw(c2575,1420) 2590,1420 2590,1220 cw(c2570,1220) 2570,1200 2400,1200 cw(c2400,1217.5) 2382.5,1217.5 2382.5,1422.5 cw(c2395,1422.5)
NetC13_2 on Top Layer "NETC13_2_L01_P004" (solid, pour order 4): 2420,1065 2480,1065 ccw(c2480,1085) 2500,1085 2500,1425 cw(c2515,1425) 2515,1440 2750,1440 ccw(c2750,1460) 2770,1460 2770,1730 ccw(c2750,1730) 2750,1750 2320,1750 ccw(c2320,1730) 2300,1730 2300,1505 ccw(c2320,1505) 2320,1485 2350,1485 cw(c2350,1465) 2370,1465 2370,1365 ccw(c2385,1365) 2385,1350 cw(c2385,1335) 2400,1335 2400,1085 ccw(c2420,1085)
GND on Layer 2 "GND_L03_P005" (solid, pour order 5): 1355.06,2360 3124.91,2360 3119.19,1702.08 2060,1702.08 2060,1090 1355.06,1090
NetJ1_1 on Layer 1 "NETJ1_1_L02_P006" (solid, pour order 6): 1355,1090 2060,1090 3120,1090 3120,2360 1355,2360

## Text inside footprints (layer, text, board x,y; h text height)
J1: Top Overlay "+" at 1811.22,1538.49 h45